# Altium PCB {TEX137}_F2837x_controlCARD_R1.3_PCB_PADS.PcbDoc (part 5 of 6)
Units mil, origin at the board's own origin, x right, y up, seen from the top; angles counter-clockwise.
Board outline 4163.98 x 2011.3 mil, 10 copper layers (Primary Side, Inner Layer 2, Inner Layer 3, Inner Layer 4, Inner Layer 5, Inner Layer 6, Inner Layer 7, Inner Layer 8, Inner Layer 9, Secondary Side), stack 103.5 mil thick; 292 components, 317 nets, 1400 pads, 1032 vias.
Unrouted connection lines stored in the file: 106.
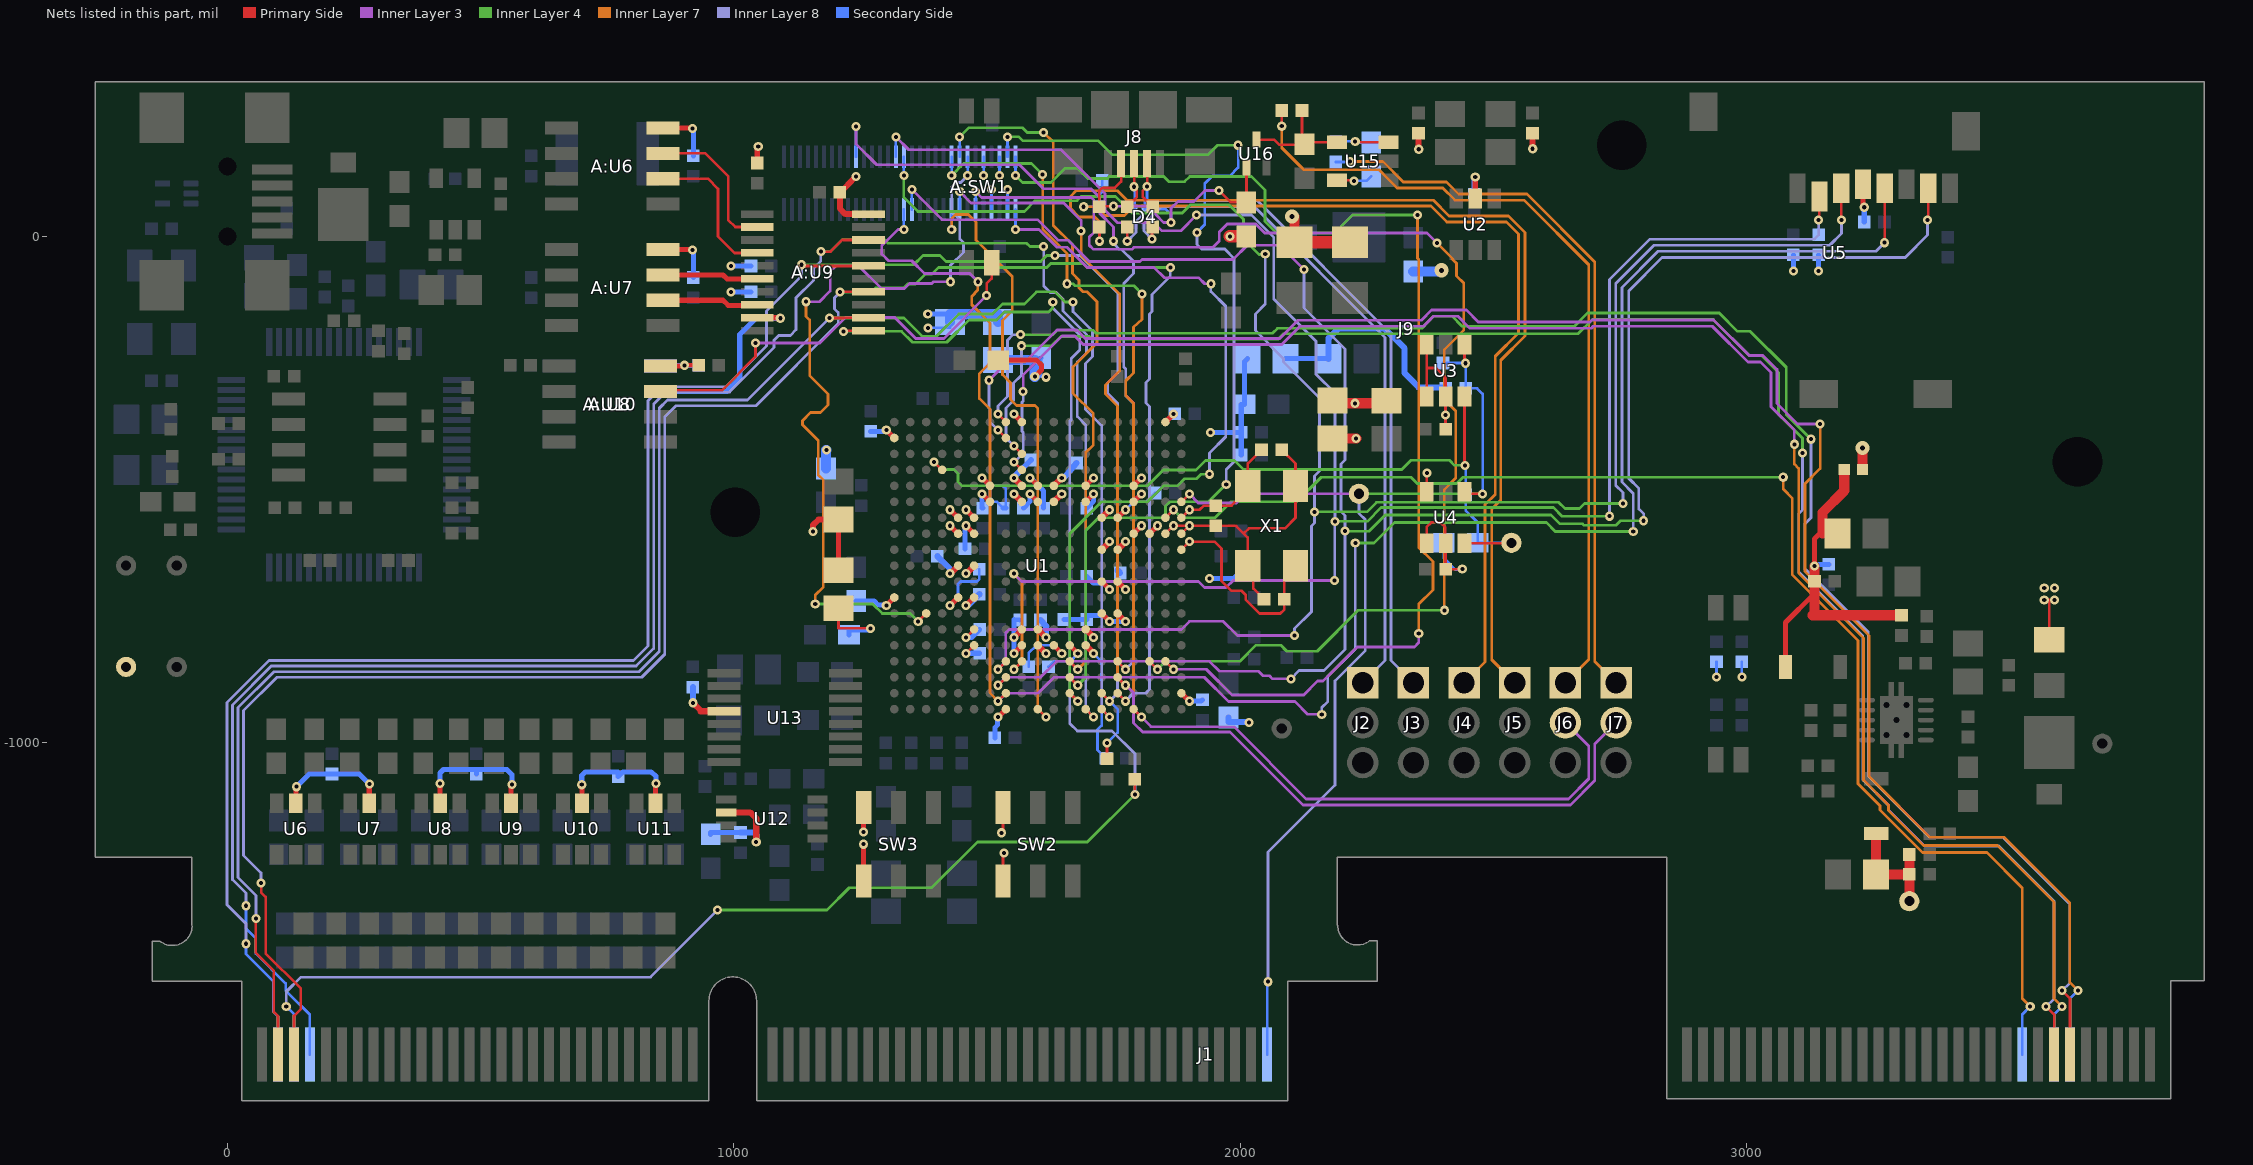
[diagram p13: the nets of this part, all layers, seen from the top]

## Via types
v1: diameter 18, hole 8, Primary Side to Secondary Side, 1025 vias
v2: diameter 28, hole 10, Primary Side to Secondary Side, 7 vias

## Nets (pads, with @x,y where several pads share a name; then routed paths per layer and width w, separated by ;. In a path a pad name is that pad's centre, name@x,y a point inside that pad or via, vN(x,y) a via of type N, cw(c..) or ccw(c..) an arc to the next point about the centre after c; other vN are vias at no path point) (continued)
MCU_GPIO-114: J9.48 U1.N3 | length 1556.8
  Primary Side w5.3: v1(1363.78,-760.24) U1.N3@1379.53,-744.49
  Inner Layer 3 w5.5: v1(1142.54,-128.99) 1168.99,-128.99 1189.99,-107.99 1189.99,-69.02 1200.99,-58.02 1245.99,-58.02 1290.99,-103.02 1336.99,-103.02 1346.99,-93.02 1390.5,-93.02 1393.98,-89.54 v1(1427.49,-89.54)
  Inner Layer 4 w5.5: v1(1160.51,-726.02) 1161,-725.54 1274,-725.54 1293,-744.54 1348.07,-744.54 v1(1363.78,-760.24)
  Inner Layer 7 w5.5: v1(1142.54,-128.99) 1142.54,-157.99 1149.54,-164.99 1149.54,-274.99 1185.54,-310.99 1185.54,-332.99 1170.54,-347.99 1151.54,-347.99 1135.54,-363.99 1135.54,-371.99 1166.54,-402.99 1166.54,-470.99 1176.54,-480.99 1176.54,-691.97 1160.51,-707.99 v1(1160.51,-726.02)
  Inner Layer 8 w5.5: v1(1427.49,-89.54) 1427.49,-57.03 1453.01,-31.51 1453.01,-12.54 1446.01,-5.54 1446.01,32.46 1430.01,48.46 1430.01,97.46 1439.01,106.46 1447.77,106.46 v1(1461.46,120.16)
  Secondary Side w5.3: v1@1461.42,120.16 J9.48@1461.42,157.16
MCU_GPIO-115: J9.59 U1.V12 | length 1555.1
  Primary Side w5.3: U1.V12@1662.99,-901.97 v1(1678.74,-917.72)
  Inner Layer 3 w5.5: v1(1555.96,13.85) 1602.15,13.85 1637.54,-21.54 1657.54,-21.54 1697.54,-61.54 1829.54,-61.54 1849.54,-81.54 1917.54,-81.54 1929.54,-93.54 v1(1941.54,-93.54)
  Inner Layer 4 w5.5: v1(1678.74,-917.72) 1662.99,-901.97 1662.99,-587.01 1725.96,-524.04 1816.57,-524.04 1848.07,-492.54 1875.63,-492.54 1889.63,-478.54 1913.01,-478.54 1922.01,-469.54 v1(1939.01,-469.54)
  Inner Layer 8 w5.5: v1(1939.01,-469.54) 1939.01,-427.54 1971.01,-395.54 1971.01,-138.06 1941.54,-108.59 v1(1941.54,-93.54)
  Secondary Side w5.3: J9.59@1555.91,53.22 1555.91,13.9 v1(1555.96,13.85)
MCU_GPIO-116: J9.43 U1.W10 | length 1212.7
  Primary Side w4.5: U1.W10@1600,-933.46 v1(1615.75,-949.21)
  Inner Layer 7 w5.5: v1(1429.96,13.85) 1429.96,35.51 1437.68,43.22 1462.68,43.22 1477.68,28.22 1477.68,-7.46 1549.54,-79.31 1549.54,-146.48 1529.99,-166.02 1529.99,-273.02 1545.99,-289.02 1545.99,-322.02 1557.99,-334.02 1594.56,-334.02 1600,-339.46 1600,-933.46 v1(1615.75,-949.21)
  Secondary Side w5.3: J9.43@1429.92,53.22 1429.92,13.89 v1(1429.96,13.85)
MCU_GPIO-117: J9.58 U1.U12 | length 1962.9
  Primary Side w5.3: U1.U12@1662.99,-870.47 v1(1678.74,-886.22)
  Inner Layer 4 w5.5: v1(1540.18,196.53) 1562.51,196.53 1570.08,188.97 1719.03,188.97 1747.02,160.98 1935.51,160.98 1954.51,179.98 v1(1995.51,179.98) ; v1(1678.74,-886.22) 1694.53,-870.44 1694.53,-580.47 1719.46,-555.54 1844.13,-555.54 1852.01,-547.66 1852.01,-532.54 1860.46,-524.08 1936.46,-524.08 1971.01,-489.54 v1(1972.01,-489.54)
  Inner Layer 8 w5.5: v1(1913.98,7.46) 1913.98,-16.03 1922.98,-25.03 1968.98,-25.03 1987.48,-43.54 1987.48,-445.03 1972.01,-460.5 v1(1972.01,-489.54)
  Secondary Side w5.3: J9.58@1540.16,157.16 v1(1540.18,196.53) ; v1(1913.98,7.46) 1929.54,23.02 1929.54,104.02 1944.98,119.46 1978.98,119.46 1995.51,136 v1(1995.51,179.98)
MCU_GPIO-118: J9.46 U1.T12 | length 1396.1
  Primary Side w5.3: U1.T12@1662.99,-838.98 v1(1678.74,-854.73)
  Inner Layer 4 w5.5: v1(1445.68,196.53) 1463.81,214.66 1569.31,214.66 1578.99,204.98 v1(1611.51,204.98)
  Inner Layer 7 w5.5: v1(1611.51,204.98) 1630.51,185.98 1630.51,21.49 1668.34,-16.34 1668.34,-73.54 1681.54,-86.73 1681.54,-101.54 1689.54,-109.54 1697.54,-109.54 1717.03,-129.03 1717.03,-210.04 1669.54,-257.54 1669.54,-310.06 1709.5,-350.03 1709.5,-412.05 1694.5,-427.05 1694.5,-838.97 v1(1678.74,-854.73)
  Secondary Side w5.3: J9.46@1445.67,157.16 v1(1445.68,196.53)
MCU_GPIO-119: J9.20 U1.T15 | length 1626.2
  Primary Side w5.3: U1.T15@1757.48,-838.98 v1(1773.23,-854.73)
  Inner Layer 3 w5.5: v1(1240.95,217.16) 1240.95,182.41 1281.95,141.41 1563.59,141.41 1611.02,93.98 1705.04,93.98 1722.27,76.74 1722.27,45.73 1749.54,18.46 v1(1749.54,-9.54)
  Inner Layer 8 w5.5: v1(1749.54,-9.54) 1749.54,-13.54 1761.54,-25.54 1765.54,-25.54 1789,-49 1789,-73.54 1769.54,-93 1769.54,-257.54 1773.54,-261.54 1773.54,-314.07 1789,-329.54 1789,-838.96 v1(1773.23,-854.73)
  Secondary Side w5.3: J9.20@1240.95,157.16 v1(1240.95,217.16)
MCU_GPIO-120: J7.2 J9.45 U1.U15 | length 2509.8
  Primary Side w5.6: U1.U15@1757.48,-870.47 v1(1773.23,-886.22)
  Inner Layer 3 w5.5: v1(1445.71,88.66) 1468.41,65.96 1651.04,65.96 1685.54,31.46 v1(1685.54,10.46) ; 1789,-960.42 1789,-900.94
  Inner Layer 3 w5.6: v1(1773.23,-886.22) 1774.28,-886.22 1789,-900.94 ; 1789,-960.42 1807.1,-978.52 1979.51,-978.52 2123.51,-1122.52 2651.51,-1122.52 2699.51,-1074.52 2699.51,-1002.3 J7.2@2741.54,-960.28
  Inner Layer 7 w5.5: v1(1685.54,10.46) 1685.54,-37.54 1761.54,-113.54 1761.54,-265.54 1733.54,-293.54 1733.54,-311.09 1757.48,-335.03 1757.48,-872.99 v1(1773.23,-886.22)
  Secondary Side w5.3: J9.45@1445.67,53.22 v1(1445.71,88.66)
MCU_GPIO-121: J6.2 J9.44 U1.W16 | length 2607.3
  Primary Side w5.6: U1.W16@1788.98,-933.46 v1(1804.73,-949.21)
  Inner Layer 3 w5.6: v1(1804.73,-949.21) 1823.49,-967.98 1986.97,-967.98 2129.51,-1110.52 2647.7,-1110.52 2687.51,-1070.71 2687.51,-1006.25 J6.2@2641.54,-960.28
  Inner Layer 4 w5.5: v1(1429.96,120.16) 1453.59,143.78 1587.67,143.78 v1(1609.49,121.97) ; v1(1657.54,-93.54) 1669.54,-93.54 1673.54,-97.54 1789.54,-97.54 v1(1805.54,-113.54)
  Inner Layer 7 w5.5: v1(1609.49,121.97) 1609.49,14.51 1657.54,-33.54 v1(1657.54,-93.54) ; v1(1804.73,-949.21) 1789,-933.49 1789,-329.54 1773.54,-314.07 1773.54,-285 1789,-269.54 1789,-179 1805.54,-164.02 v1(1805.54,-113.54)
  Secondary Side w5.3: v1@1429.92,120.16 J9.44@1429.92,157.16
MCU_GPIO-122: J9.32 U1.T8 U5.3 | length 4082.5
  Primary Side w5.3: v1(1521.26,-854.73) U1.T8@1537.01,-838.98 ; U5.3@3186,95 3186,32.52 v1(3186.54,32.52)
  Inner Layer 3 w5.5: v1(1521.26,-854.73) 1536.54,-839.45 1536.54,-782.48 1543.04,-775.98 1883.56,-775.98 1899.54,-760 1966.02,-760 1994.04,-788.02 v1(2107,-788.02)
  Inner Layer 4 w5.5: v1(1335.46,120.16) 1335.46,76.85 1363.03,49.28 1573.54,49.28 1594.72,70.46 1677.54,70.46 1685.54,78.46 1753.54,78.46 1786.02,45.98 1885.05,45.98 1901.54,62.46 1977.54,62.46 2006.28,33.72 2006.28,-4.79 2036.99,-35.5 2048.51,-35.5 v1(2048.99,-35.02) ; v1(2146.03,-543.8) 2249.6,-543.8 2268.3,-525.1 2628.51,-525.1 2640.89,-537.48 2669.54,-537.48 2679.54,-527.48 v1(2755.54,-527.48)
  Inner Layer 8 w5.5: v1(2048.99,-35.02) 2048.99,-133.54 2029.54,-152.99 2029.54,-186.04 2085.03,-241.54 2085.03,-248.02 2156.03,-319.02 2156.03,-462.98 2146.03,-472.98 v1(2146.03,-543.8) 2146.03,-566.02 2140.01,-572.05 2140.01,-740.99 2106.5,-774.5 2106.5,-794 v1(2107,-788.02) ; v1(2755.54,-527.48) 2755.54,-505.98 2741.04,-491.48 2741.04,-92.98 2816.54,-17.48 3163.54,-17.48 3186.54,5.52 v1(3186.54,32.52)
  Secondary Side w5.3: v1(1335.46,120.16) J9.32@1335.46,157.16
MCU_GPIO-123: J9.33 U1.U8 U5.7 | length 4272.7
  Primary Side w5.3: v1(1521.26,-886.22) U1.U8@1537.01,-870.47 ; v1(3356.54,32.52) 3358,32.52 U5.7@3358,95
  Inner Layer 3 w5.5: v1(1351.21,92.6) 1410.85,32.96 1599.04,32.96 1639.54,-7.54 1659.54,-7.54 1701.54,-49.54 1801.54,-49.54 1805.54,-45.54 1985.54,-45.54 2013.54,-17.54 2077.54,-17.54 v1(2125.54,-65.54) ; v1(1521.26,-886.22) 1537,-870.48 1605.52,-870.48 1637.02,-838.98 1939.04,-838.98 1958.57,-858.51 2035.46,-858.51 2044.46,-867.51 2057.46,-867.51 2063.46,-873.51 v1(2099.46,-873.51)
  Inner Layer 4 w5.5: v1(2206.61,-582) 2206.31,-582.3 2206.31,-582.18 2253.81,-582.18 2285.97,-550.02 2613.06,-550.02 2630.51,-567.48 2675.11,-567.48 2678.04,-570.41 2741.61,-570.41 2750.54,-561.48 v1(2796.04,-561.48)
  Inner Layer 8 w5.5: v1(2099.46,-873.51) 2115.95,-857.02 2164.95,-857.02 2206.61,-815.37 v1(2206.61,-582) 2206.61,-551.35 2198.74,-543.48 2198.74,-449.19 2206.61,-441.31 2206.61,-222.14 2125.54,-141.06 v1(2125.54,-65.54) ; v1(2796.04,-561.48) 2796.04,-547.48 2786.54,-537.98 2786.54,-497.48 2766.54,-477.48 2766.54,-107.48 2832.54,-41.48 3312.54,-41.48 3356.54,2.52 v1(3356.54,32.52)
  Secondary Side w5.3: J9.33@1351.18,53.22 v1(1351.21,92.6)
MCU_GPIO-124: J9.31 U1.V8 U5.5 | length 4001
  Primary Side w5.3: v1(1521.26,-917.72) U1.V8@1537.01,-901.97 ; v1(3271.54,-12.48) 3272,-12.02 U5.5@3272,95
  Inner Layer 3 w5.5: v1(1335.46,13.85) 1323.86,13.85 1291.99,-18.02 1291.99,-35.02 1304.99,-48.02 1350.99,-48.02 1376.5,-73.54 1465.54,-73.54 v1(1481.54,-89.54) ; v1(1521.26,-917.72) 1536.96,-902.02 1600.5,-902.02 1632.04,-870.48 1928.46,-870.48 1976.48,-918.5 2107.51,-918.5 2132.51,-943.5 2159.99,-943.5 v1(2160.51,-944.02)
  Inner Layer 4 w5.5: v1(2226.71,-605.3) 2226.71,-605.5 2263.69,-605.5 2304.17,-565.02 2604.06,-565.02 2621.51,-582.48 v1(2775.54,-582.48)
  Inner Layer 7 w5.5: v1(1481.54,-89.54) 1481.54,-105.52 1469.48,-119.03 1469.48,-135.04 1505.51,-171.22 1505.51,-250.01 1484.49,-271.03 1484.49,-320.01 1505.51,-341.03 1505.51,-901.46 v1(1521.26,-917.72)
  Inner Layer 8 w5.5: v1(2160.51,-944.02) 2160.51,-930.49 2172.5,-918.5 2172.5,-868.48 2226.71,-814.27 v1(2226.71,-605.3) ; v1(2775.54,-582.48) 2775.54,-507.48 2753.04,-484.98 2753.04,-100.98 2824.54,-29.48 3254.54,-29.48 v1(3271.54,-12.48)
  Secondary Side w5.3: v1@1335.43,13.88 J9.31@1335.43,53.22
MCU_GPIO-125: J9.30 R15.2 U1.T9 U5.2 | length 4098
  Primary Side w5.3: v1(1552.75,-854.73) U1.T9@1568.5,-838.98 ; v1(3141.54,32.52) 3143,37.52 U5.2@3143,79
  Inner Layer 3 w5.5: v1(1319.68,196.53) 1345.24,170.98 1645.99,170.98 1732.54,84.43 1732.54,51.46 1757.02,26.98 1829.02,26.98 1845.02,10.98 1882.05,10.98 v1(1913.54,42.46) ; v1(1552.54,-665.99) 1567.88,-681.34 1917.15,-681.34 1929.1,-693.29 1971.71,-693.29 1985.84,-679.15 v1(2185.97,-679.15)
  Inner Layer 4 w5.5: v1(2186.54,-562.6) 2250.49,-562.6 2277.78,-535.3 2617.79,-535.3 2634.97,-552.48 v1(2728.54,-552.48)
  Inner Layer 7 w5.5: v1(1552.54,-665.99) 1568.5,-681.96 1568.5,-838.98 v1(1552.75,-854.73)
  Inner Layer 8 w5.5: v1(1913.54,42.46) 2021.54,42.46 2065.54,-1.54 2065.54,-123.26 2149.31,-207.03 2149.31,-272.18 2186.54,-309.41 v1(2186.54,-562.6) 2185.97,-563.17 v1(2185.97,-679.15) ; v1(2728.54,-552.48) 2728.54,-85.48 2808.54,-5.48 3133.54,-5.48 3141.54,2.52 v1(3141.54,32.52)
  Secondary Side w5.3: J9.30@1319.69,157.16 v1(1319.68,196.53) ; R15.2@3141.54,3.46 v1(3141.54,32.52)
MCU_GPIO-133: J1.164 U1.G18 | length 2698.7
  Primary Side w5.3: U1.G18@1851.97,-555.51 v1(1867.72,-539.76)
  Inner Layer 4 w5.5: v1(1867.72,-539.76) 1883.47,-555.51 1949.48,-555.51 1981.01,-523.98 2111.04,-523.98 2159.54,-475.48 2336.48,-475.48 2349.03,-488.03 2426.93,-488.03 2439.48,-475.48 v1(3071.54,-475.48)
  Inner Layer 7 w5.5: v1(3071.54,-475.48) 3071.54,-499.1 3089.61,-517.18 3089.61,-668.25 3218.98,-797.62 3218.98,-1080.63 3262.54,-1124.19 3262.54,-1132.48 3346.54,-1216.48 3473.54,-1216.48 3543.44,-1286.39 3543.44,-1504.85 v1(3559.19,-1520.6)
  Secondary Side w5.3: J1.164@3543.51,-1615.1 3543.51,-1536.29 v1(3559.19,-1520.6)
MCU_GPIO-136: J9.49 U1.T17 | length 2535.4
  Primary Side w5.3: U1.T17@1820.47,-838.98 v1(1836.22,-854.73)
  Inner Layer 3 w5.5: v1(1477.21,88.66) 1488.91,76.96 1705.04,76.96 1710.54,71.46 1710.54,7.46 1701.54,-1.54 1701.54,-17.54 1709.54,-25.54 1785.54,-25.54 1789.54,-21.54 1945.95,-21.54 1957.95,-9.54 1957.95,8.16 1973.95,24.16 2030.25,24.16 2047.95,6.46 2368.54,6.46 v1(2388,-13)
  Inner Layer 4 w5.5: v1(1836.22,-854.73) 1851.97,-838.98 1998.51,-838.98 2030.46,-807.02 2079.51,-807.02 2091.51,-819.02 2151.51,-819.02 2232.32,-738.22 v1(2402.53,-738.22)
  Inner Layer 7 w5.5: v1(2388,-13) 2419.5,-44.5 2418,-44.5 2426.5,-53 2426.5,-78 2441,-92.5 2441,-184.53 2402.53,-223 2402.53,-321.84 2424.95,-344.26 2424.95,-477.42 2402.53,-499.84 v1(2402.53,-738.22)
  Secondary Side w5.3: J9.49@1477.17,53.22 v1(1477.21,88.66)
MCU_GPIO-137: J9.60 U1.T18 | length 2403.1
  Primary Side w5.3: U1.T18@1851.97,-838.98 v1(1867.72,-854.73)
  Inner Layer 3 w5.5: v1(1867.72,-854.73) 1932.46,-854.73 1983.25,-905.51 2124.98,-905.51 2152.46,-878.02 2162.97,-878.02 2230.51,-810.48 2343.51,-810.48 2352.03,-801.96 v1(2352.03,-783.85)
  Inner Layer 4 w5.5: v1(1555.96,120.16) 1569.6,106.53 1625.6,106.53 1653.54,134.46 1677.98,134.46 1697.98,114.46 1737.54,114.46 1741.04,117.97 1848.49,117.97 1858.49,107.97 1889.54,107.97 1900.03,118.46 2021.54,118.46 2048.29,91.71 2048.29,29.22 2071.04,6.46 2185.54,6.46 2221.54,42.46 v1(2349.54,42.46)
  Inner Layer 7 w5.5: v1(2349.54,42.46) 2349.54,-43.04 2352.03,-45.54 2352.03,-614.02 2380,-642 2380,-698.05 2352.03,-726.02 v1(2352.03,-783.85)
  Secondary Side w5.3: J9.60@1555.91,157.16 1555.91,120.16 v1(1555.96,120.16)
MCU_GPIO-161: J1.167 U1.C9 | length 3480.4
  Primary Side w5.3: v1(1552.75,-413.78) U1.C9@1568.5,-429.53 ; v1(3590.69,-1520.6) 3606.42,-1536.33 J1.167@3606.42,-1615.1
  Inner Layer 4 w5.5: v1(1567.99,-216.02) 1627.05,-216.02 1645.54,-197.54 1701.54,-197.54 1707.1,-203.1 2074.44,-203.1 2085.44,-192.1 2666.91,-192.1 2694.81,-164.2 2933.26,-164.2 3004.84,-235.78 3029.84,-235.78 3062.54,-268.48 3062.54,-351.48 3109.54,-398.48 v1(3109.54,-427.48)
  Inner Layer 8 w5.5: v1(1552.75,-413.78) 1537.01,-398.03 1537.01,-338.97 1543.71,-332.25 1551.99,-323.97 1551.99,-289.77 1567.68,-274.08 1567.68,-242.58 1567.99,-227.58 v1(1567.99,-216.02) ; v1(3109.54,-427.48) 3109.54,-540.48 3102.06,-547.95 3102.06,-662.1 3228.47,-788.51 3228.47,-1072.13 3279.54,-1123.19 3279.54,-1132.48 3350.54,-1203.48 3497.44,-1203.48 3606.44,-1312.48 3606.44,-1505.35 v1(3590.69,-1520.6)
MCU_GPIO-162: J1.168 U1.D9 | length 3468.5
  Primary Side w5.3: v1(1552.75,-445.27) U1.D9@1568.5,-461.02
  Inner Layer 3 w5.5: v1(1570.99,-306.02) 1570.99,-273.51 1647.73,-196.78 1672.78,-196.78 1689.54,-213.54 2081.54,-213.54 2117.54,-177.54 2361.54,-177.54 2381.54,-157.54 2429.04,-157.54 2453.04,-181.54 2692.48,-181.54 2696.54,-177.48 2931.54,-177.48 3001.94,-247.88 3026.94,-247.88 3047.54,-268.48 3047.54,-336.48 3093.54,-382.48 v1(3093.54,-410.48)
  Inner Layer 7 w5.5: v1(3093.54,-410.48) 3093.54,-449.58 3102.11,-458.15 3102.11,-664.85 3229.98,-792.72 3229.98,-1073.63 3279.54,-1123.19 3279.54,-1133.48 3348.54,-1202.48 3494.51,-1202.48 3606.44,-1314.41 3606.44,-1504.85 v1(3622.19,-1520.6)
  Inner Layer 8 w5.5: v1(1552.75,-445.27) 1570.99,-429.52 1570.99,-387.02 1568.99,-385.02 1568.99,-327.02 1570.99,-325.02 v1(1570.99,-306.02)
  Secondary Side w5.3: J1.168@3606.51,-1615.1 3606.51,-1536.29 v1(3622.19,-1520.6)
MCU_GPIO-163: J1.169 U1.A8 | length 3497.8
  Primary Side w5.3: v1(1521.29,-350.78) U1.A8@1537.01,-366.54 ; v1(3622.19,-1489.1) 3637.92,-1504.82 J1.169@3637.92,-1615.1
  Inner Layer 4 w5.5: v1(1565.99,-194.02) 1629.54,-194.02 1638.03,-185.54 1709.54,-185.54 1715.3,-191.3 2063.14,-191.3 2072.9,-181.54 2357.86,-181.54 2381.38,-157.54 2417.59,-157.54 2437.54,-177.48 2659.33,-177.48 2685.51,-151.3 2945.36,-151.3 2981.54,-187.48 3006.54,-187.48 3077.54,-258.48 3077.54,-351.48 v1(3126.54,-400.48)
  Inner Layer 8 w5.5: v1(1521.29,-350.78) 1521.29,-335.04 1539.99,-316.33 1539.99,-205.02 1550.99,-194.02 v1(1565.99,-194.02) ; v1(3126.54,-400.48) 3126.54,-555.48 3114.06,-567.95 3114.06,-656.1 3239.47,-781.51 3239.47,-1065.13 3360.82,-1186.48 3505.44,-1186.48 3637.44,-1318.48 3637.44,-1473.86 v1(3622.19,-1489.1)
MCU_GPIO-164: J1.170 U1.B8 | length 3548.9
  Primary Side w5.3: v1(1521.29,-382.28) U1.B8@1537.01,-398.03
  Inner Layer 3 w5.5: v1(1503.49,-284.03) 1539.24,-248.28 1574.45,-248.28 1637.7,-185.02 1677.02,-185.02 1693.54,-201.54 2077.54,-201.54 2113.54,-165.54 2357.54,-165.54 2377.54,-145.54 2446.04,-145.54 2469.54,-169.03 2689.98,-169.03 2693.84,-165.18 2934.24,-165.18 3004.44,-235.38 3031.94,-235.38 3059.04,-262.48 3059.04,-329.98 3099.54,-370.48 v1(3144.54,-370.48)
  Inner Layer 7 w5.5: v1(3144.54,-370.48) 3144.54,-458.48 3114.54,-488.48 3114.54,-661.38 3240.98,-787.82 3240.98,-1065.92 3361.54,-1186.48 3508.01,-1186.48 3637.38,-1315.85 3637.38,-1473.35 3637.94,-1473.35 v1(3653.69,-1489.1)
  Inner Layer 8 w5.5: v1@1503.46,-284.06 1503.46,-339.98 1505.51,-342.03 1505.51,-366.5 v1(1521.29,-382.28)
  Secondary Side w5.3: J1.170@3638.01,-1615.1 3638.01,-1504.79 v1(3653.69,-1489.1)
MCU_GPIO-168: C5.2 R19.2 TP3.1 U1.D4 U3.6 U4.6 | length 1599.3
  Primary Side w5.3: v1(1395.27,-445.27) U1.D4@1411.02,-461.02 ; U4.6@2442.4,-606 2534,-606 TP3.1@2535,-605 ; U3.6@2442.4,-316 2442.4,-450.91 v1(2443.51,-452.02)
  Inner Layer 4 w5.5: v1(1395.27,-445.27) 1410.47,-460.47 1434.59,-460.47 1442.46,-468.35 1442.46,-484.66 1450.34,-492.54 1816.01,-492.54 1847.56,-460.98 1912.5,-460.98 1930.94,-442.54 1988.07,-442.54 2006.01,-460.47 2318.51,-460.47 2336.96,-442.02 2412.51,-442.02 2422.51,-452.02 v1(2443.51,-452.02)
  Secondary Side w5.3: v1(2443.51,-452.02) 2445,-453.51 C5.2@2445,-510 2444.51,-510.49 2444.51,-541.04 2468.5,-565.02 R19.2@2468.5,-605 TP3.1@2535,-605
MCU_TCK: A:U9.14 J1.5 U1.V15 | length 4236.4
  Primary Side w5.3: v1(66.54,-1276.54) 66.54,-1295.1 75.53,-1304.09 75.53,-1415.76 144.87,-1485.1 144.87,-1525.22 131.3,-1538.79 J1.5@131.3,-1615.1 ; v1(1209.56,-110.1) 1210.18,-109.49 A:U9.14@1266.06,-109.49 ; U1.V15@1757.48,-901.97 v1(1773.23,-917.72)
  Inner Layer 4 w5.5: v1(1209.56,-110.1) 1246.03,-110.1 1251.32,-104.81 1277.16,-104.81 1279.93,-102.03 1334.75,-102.03 1342.75,-94.03 1358.51,-94.03 1378.02,-74.52 1390.8,-74.52 1403.78,-61.54 1617.54,-61.54 1625.54,-53.54 1689.54,-53.54 1697.54,-61.54 v1(1861.54,-61.54)
  Inner Layer 8 w5.5: v1(66.54,-1276.54) 66.54,-1256.54 32.03,-1222.03 32.03,-935.97 97.53,-870.47 818.03,-870.47 863.5,-825 863.5,-356.29 885.5,-334.29 1043.79,-334.29 1205.76,-172.31 1205.76,-150.31 1198.48,-143.03 1198.48,-121.18 v1(1209.56,-110.1) ; v1(1773.23,-917.72) 1788.44,-901.97 1812.95,-901.97 1820.47,-894.44 1820.51,-336.03 1813.49,-329.01 1813.49,-288.53 1820.51,-281.5 1820.52,-153.26 1825.54,-148.24 1825.54,-114.55 1861.54,-78.55 v1(1861.54,-61.54)
MCU_TDI: A:U9.18 J1.8 U1.W13 | length 4212.1
  Primary Side w5.3: v1(1171.56,-30.1) 1190.56,-30.13 1213.56,-7.13 A:U9.18@1266.06,-7.13 ; U1.W13@1694.49,-933.46 v1(1710.24,-949.21)
  Inner Layer 4 w5.5: v1(1171.56,-30.1) 1190.9,-30.1 1214.52,-6.48 1296.84,-6.48 1303.89,-13.54 1577.94,-13.54 1584.42,-20.02 1610.54,-20.02 v1(1611.54,-20.02)
  Inner Layer 8 w5.5: v1(36.54,-1321.54) 36.54,-1296.54 10.03,-1270.03 10.03,-924.97 86.53,-848.47 807.03,-848.47 841.5,-814 841.5,-331.33 864.83,-308 991,-307.55 1078.98,-219.57 1078.98,-205.02 1088.5,-195.5 1111.48,-195.5 1122.76,-184.22 1122.76,-121.24 1157.02,-86.99 1157.02,-63.54 1171.56,-48.99 v1(1171.56,-30.1) ; v1(1611.54,-20.02) 1611.54,-97.54 1624.54,-110.54 1636.54,-110.54 1649.54,-123.54 1649.54,-147.08 1695.99,-193.54 1695.99,-230.3 1677.99,-248.3 1677.99,-355.55 1694.49,-372.05 1694.49,-933.46 v1(1710.24,-949.21)
  Secondary Side w5.3: v1(36.54,-1321.54) 36.54,-1366.54 56.18,-1386.18 56.18,-1416.18 115,-1475 115,-1488.92 162.8,-1536.72 J1.8@162.8,-1615.1
MCU_TDO: A:U9.11 J1.6 R10.1 | length 3604.4
  Primary Side w5.3: v1(1216.54,-187.48) 1217.76,-186.26 A:U9.11@1266.06,-186.26 ; v1(1791.54,-1101.54) R10.1@1791.54,-1071.54
  Inner Layer 4 w5.5: v1(967.38,-1330.1) 1183.4,-1330.1 1227.61,-1285.89 1390.39,-1285.89 1480.81,-1195.47 1697.6,-1195.47 v1(1791.54,-1101.54) ; v1(1216.54,-187.48) 1330.94,-187.48 1352.49,-209.03 1420.16,-209.03 1464.17,-165.02 1518.5,-165.02 1533.98,-149.54 1621.54,-149.54 1629.54,-141.54 1629.54,-130.86 v1(1629.54,-129.54)
  Inner Layer 8 w5.5: v1(116.18,-1520.1) 116.18,-1491.3 145,-1462.48 835,-1462.48 v1(967.38,-1330.1) ; v1(1629.54,-129.54) 1629.54,-141.57 1682.68,-194.72 1682.68,-224.17 1666,-240.85 1666,-362.03 1662.99,-365.03 1662.99,-961.54 1677.99,-976.54 1746.59,-976.54 1791.54,-1021.48 v1(1791.54,-1101.54)
  Secondary Side w5.3: v1(116.18,-1520.1) 131.3,-1535.1 J1.6@131.3,-1615.1
MCU_TMS: A:U9.12 J1.3 U1.W14 | length 3986
  Primary Side w5.3: v1(56.18,-1346.54) 56.18,-1414.48 91.67,-1449.97 91.67,-1531.48 99.81,-1539.62 J1.3@99.81,-1615.1 ; v1(1188.56,-161.1) 1216.1,-161.1 1216.54,-160.67 A:U9.12@1266.06,-160.67 ; U1.W14@1725.98,-933.46 v1(1741.73,-949.21)
  Inner Layer 4 w5.5: v1(1188.56,-161.1) 1335.49,-161.1 1371.42,-197.03 1400.48,-197.03 1443.98,-153.54 1509.98,-153.54 1529.98,-133.54 1573.54,-133.54 1597.57,-109.5 1633.5,-109.5 1653.54,-129.54 v1(1669.54,-129.54)
  Inner Layer 8 w5.5: v1(56.18,-1346.54) 56.18,-1301.18 21.03,-1266.03 21.03,-930.47 92.03,-859.47 812.53,-859.47 852.5,-819.5 852.5,-339.33 869,-322.83 1026.83,-322.83 v1(1188.56,-161.1) ; v1(1669.54,-129.54) 1669.54,-148.64 1707.68,-186.78 1707.68,-237.13 1693.99,-250.82 1693.99,-341.55 1725.98,-373.54 1725.98,-933.46 v1(1741.73,-949.21)
MCU_TRSTN: A:U9.16 J1.4 R9.2 U1.V14 | length 4352.8
  Primary Side w5.3: v1(1133.5,-56.03) 1134.29,-58.31 A:U9.16@1266.06,-58.31 ; U1.V14@1725.98,-901.97 v1(1741.73,-917.72) ; R9.2@1736.54,-1031.54 v1(1736.54,-1000.48)
  Inner Layer 4 w5.5: v1(1133.5,-56.03) 1355.04,-56.03 1373.54,-37.54 1407.04,-37.54 1419.04,-49.54 1605.54,-49.54 1617.54,-37.54 v1(1633.54,-37.54)
  Inner Layer 8 w5.5: v1(36.54,-1396.54) 36.54,-1356.98 -0.97,-1319.47 -0.97,-920.54 82.09,-837.47 801.53,-837.47 830.5,-808.5 830.5,-324.5 858,-297 983.55,-297 1064.48,-216.07 1064.48,-147.18 1133.5,-78.16 v1(1133.5,-56.03) ; v1(1633.54,-37.54) 1683.01,-37.54 1758.01,-112.54 1758.01,-269.06 1737.54,-289.54 1737.54,-309.54 1757.48,-329.48 1757.48,-901.97 v1(1741.73,-917.72)
  Secondary Side w5.3: v1(36.54,-1396.54) 36.54,-1416.54 90.64,-1470.64 90.64,-1530.94 99.81,-1540.1 J1.4@99.81,-1615.1 ; v1(1736.54,-1000.48) 1757.54,-979.48 1757.54,-933.52 v1(1741.73,-917.72)
MCU_X1: C7.2 R24.1 U1.G19 X1.1 | length 243.4
  Primary Side w5.3: U1.G19@1883.46,-555.51 v1(1899.21,-539.76) 1919.54,-539.76 1927.76,-531.54 R24.1@1951.54,-531.54 1982.54,-531.54 2013.54,-500.54 2013.54,-493.55 X1.1@2014.29,-492.8 2014.54,-492.55 2014.54,-448.54 C7.2@2041.54,-421.54
MCU_X2: C8.2 U1.J19 X1.3 | length 409.9
  Primary Side w5.3: U1.J19@1883.46,-618.5 v1(1899.26,-602.77) 1948.75,-602.77 1962.54,-616.54 1962.54,-680.54 1981.54,-699.54 2001.54,-699.54 2010.54,-708.54 2010.54,-717.56 2037.51,-744.54 2078.54,-744.54 2086.54,-736.54 C8.2@2086.54,-716.54 2086.54,-672.52 X1.3@2108.78,-650.28
MCU_XRSN: C3.2 J1.120 R18.2 TP2.1 U1.F19 U3.1 U4.1 | length 2216.5
  Primary Side w5.3: U1.F19@1883.46,-524.02 v1(1899.21,-508.27) ; U4.1@2442.4,-504 2442.4,-508.25 v1(2478.09,-508.25) ; U3.1@2442.4,-214 2442.4,-248.34 v1(2444.53,-250.47)
  Inner Layer 3 w5.5: v1(1899.21,-508.27) 1899.84,-508.89 1916.81,-526.51 1992.03,-526.51 2010.28,-508.26 TP2.1@2233.96,-508.25
  Inner Layer 4 w5.5: TP2.1@2233.96,-508.25 v1(2478.09,-508.25)
  Inner Layer 8 w5.5: v1(2054.54,-1471.48) 2054.54,-1215.48 2186.54,-1083.48 2186.54,-877.44 2246.54,-817.44 2246.54,-559.44 2233.96,-546.86 TP2.1@2233.96,-508.25
  Secondary Side w5.3: J1.120@2052.67,-1615.1 2052.67,-1471.48 v1(2054.54,-1471.48) ; C3.2@2400,-250 2444.06,-250 v1(2444.53,-250.47) 2445,-250.94 R18.2@2445,-300 2467,-300 2478.09,-311.09 v1(2478.09,-508.25)
MID_SCI-RX: A:SW1.2 A:U10.7 | length 841.8
  Primary Side w5.3: A:U10.7@855,-306.1 855.9,-304.1 976.04,-304.1 1042.54,-237.6 v1(1042.54,-210.48) ; v1(1498.99,-117.02) 1498.99,-92.91 1508.88,-83.02 A:SW1.2@1508.88,-52.36
  Inner Layer 3 w5.5: v1(1042.54,-210.48) 1169.85,-210.48 1220.31,-160.02 1317.54,-160.02 1359.05,-201.54 1414.48,-201.54 v1(1498.99,-117.02)
MID_TCK: A:U7.7 A:U9.6 | length 189.5
  Primary Side w10: A:U7.7@859.81,-76.1 978.56,-76.1 986.36,-83.9 A:U9.6@1046.06,-83.9
MID_TDI: A:U6.7 A:U9.2 | length 297
  Primary Side w5.3: A:U6.7@859.81,163.9 943.56,163.9 988.56,118.9 988.56,32.6 1002.7,18.46 A:U9.2@1046.06,18.46
MID_TDO: A:U8.2 A:U9.9 | length 392.9
  Primary Side w10: A:U9.9@1046.06,-160.67 1090.51,-160.67 v1(1091.5,-161.66)
  Secondary Side w10: A:U8.2@854.81,-306.1 985.43,-306.1 1011.54,-280 1011.54,-193.66 1043.54,-161.66 v1(1091.5,-161.66)
MID_TMS: A:U7.6 A:U9.8 | length 190.8
  Primary Side w10: A:U7.6@859.81,-126.1 978.56,-126.1 988.56,-136.1 1045.04,-136.1 A:U9.8@1046.06,-135.08
MID_TRSTN: A:U6.6 A:U9.4 | length 301.9
  Primary Side w5.3: A:U6.6@859.81,113.9 948.56,113.9 968.56,93.9 968.56,0.1 1001.38,-32.72 A:U9.4@1046.06,-32.72
OSC_GND: C7.1 C8.1 R24.2 U1.H18 U1.H19 X1.2 X1.4 | length 624.5
  Primary Side w5.3: U1.H18@1851.97,-587.01 v1(1867.72,-571.26) v1(1899.21,-571.26) ; U1.H19@1883.46,-587.01 v1(1899.21,-571.26) ; C8.1@2046.54,-716.54 2025.54,-695.54 2025.54,-653.54 2014.54,-653.54 2014.54,-650.52 X1.2@2014.29,-650.28 2014.29,-594.54 1991.29,-571.54 ; C7.1@2081.54,-421.54 2108.78,-448.78 X1.4@2108.78,-492.8 2108.78,-555.54 2087.78,-576.54 2016.54,-576.54 2006.41,-586.66 1991.29,-571.54 ; v1(1899.21,-571.26) 1951.26,-571.26 R24.2@1951.54,-571.54 1991.29,-571.54
USB0_EPEN: J6.1 R81.1 | length 1619.8
  Primary Side w5.6: v1(2081.54,217.52) R81.1@2081.54,248.46
  Inner Layer 7 w5.6: v1(2081.54,217.52) 2081.54,174.92 2124.98,131.48 2273.51,131.48 2309.51,95.48 2399.51,95.48 2423.51,71.48 2560.07,71.48 2687.51,-55.96 2687.51,-835.56 J6.1@2641.54,-881.54
USB0_GPIO-42: J2.1 R76.1 | length 1359.4
  Primary Side w5.6: v1(1825.54,-5.54) 1825.54,18.46 R76.1@1826.54,18.46
  Inner Layer 8 w5.6: v1(1825.54,-5.54) 1809.54,10.46 1809.54,25.46 1842.54,58.46 2027.54,58.46 2285.54,-199.54 2285.54,-837.54 J2.1@2241.54,-881.54
USB0_GPIO-43: J3.1 R77.1 | length 1410.6
  Primary Side w5.6: v1(1776.54,-9.54) R77.1@1776.54,18.46
  Inner Layer 8 w5.6: v1(1776.54,-9.54) 1793.54,7.46 1793.54,29.46 1834.54,70.46 2033.54,70.46 2297.54,-193.54 2297.54,-837.54 J3.1@2341.54,-881.54
USB0_GPIO-46: J4.1 R79.1 R80.1 | length 1913.5
  Inner Layer 7 w5.5: v1(1690.54,58.46) 1715.49,58.46 1732.49,40.97 1770.97,40.97 1790,60 2376,60 2407.42,28.58 2525.35,28.58 2548.97,4.95 2548.97,-190.67 2503.07,-236.57 2503.07,-509.46 2483.07,-529.46 2483.07,-840 J4.1@2441.54,-881.54
  Secondary Side w5.3: v1(1690.54,58.46) 1691.07,59 R80.1@1721.54,58.46 1721.54,82 1727,87.46 R79.1@1727,111
USB0_GPIO-47: J5.1 R82.1 | length 2029.4
  Primary Side w5.6: v1(1721.54,-9.54) R82.1@1721.54,18.46
  Inner Layer 7 w5.6: v1(1721.54,-9.54) 1721.54,29.42 1712.49,38.46 1681.49,38.46 1664.49,55.46 1664.49,78.97 1675.49,89.97 1757.01,89.97 1775.5,71.48 2380.52,71.48 2412.03,39.97 2529.28,39.97 2561.71,7.55 2561.71,-196.77 2514,-244.47 2514,-520.54 2496,-538.54 2496,-836 J5.1@2541.54,-881.54
USB0_PFLT: J7.1 R78.1 | length 1442.2
  Inner Layer 7 w5.6: v1(2216.54,147.52) 2281.47,147.52 2321.51,107.48 2406.57,107.48 2430.57,83.48 2565.57,83.48 2699.51,-50.46 2699.51,-839.51 J7.1@2741.54,-881.54
  Secondary Side w5.6: R78.1@2188.07,146.93 2215.94,146.93 v1(2216.54,147.52)
USB-DM: D4.2 J8.2 R76.2 | length 143.2
  Primary Side w5: J8.2@1815.59,143.7 v1(1815.59,98.59) 1807.54,90.54 1807.54,77.46 R76.2@1826.54,58.46
  Secondary Side w5.3: D4.2@1811,53.76 1811,70 1815.59,74.59 v1(1815.59,98.59)
USB-DP: D4.1 J8.3 R77.2 | length 140.2
  Primary Side w5: R77.2@1776.54,58.46 1795.54,77.46 1795.54,92.46 v1(1790,98) J8.3@1790,143.7
  Secondary Side w5.3: v1(1790,98) 1791.32,96.69 D4.1@1791.32,53.76
USB-EPEN: R81.2 R86.1 U15.4 U16.3 | length 243.1
  Primary Side w5.3: U16.3@2031.54,191.02 2066.54,191.02 2076.54,181.02 2125.59,181.02 R86.1@2126.54,181.96 ; R81.2@2121.54,248.46 2121.54,186.96 R86.1@2126.54,181.96 ; U15.4@2190.54,185.86 2122.64,185.86 2122.09,186.41 R86.1@2126.54,181.96
USB-ID: D4.3 J8.4 R82.2 R85.2 U16.1 | length 596.3
  Primary Side w5: v1(1957.54,90.46) 1981.04,66.96 R85.2@2011.54,66.96
  Primary Side w5.3: v1(1749.54,59.46) 1721.54,59.46 R82.2@1721.54,58.46 1721.54,88.59 1720.54,89.59 1726.54,95.59 1751.54,95.59 1764.41,108.46 J8.4@1764.41,143.7 ; R85.2@2011.54,66.96 2011.85,67.28 U16.1@2011.85,135.91
  Inner Layer 3 w5.5: v1(1749.54,59.46) 1817.16,59.46 1848.2,27.48 v1(1863.03,27.48) 1863.03,55.51 1876.49,68.97 1908.56,68.97 1930.06,90.46 v1(1957.54,90.46)
  Secondary Side w5.3: D4.3@1830.69,53.76 1851.75,53.76 1863.03,42.48 v1(1863.03,27.48)
USB-PFLT: R78.2 R84.2 U15.3 | length 138.8
  Primary Side w5.3: v1(2226.54,187.52) 2226.54,185.86 U15.3@2292.54,185.86
  Secondary Side w5.3: R78.2@2188.07,186.93 2188.66,187.52 v1(2226.54,187.52) 2228.63,185.43 R84.2@2258.07,185.43
USB_5V0: C93.1 C94.1 R62.1 R83.1 R84.1 U15.5 | length 383.8
  Primary Side w5.3: U15.5@2190.54,111.06 2222.52,111.06 v1(2224.18,109.4) ; v1(3586.95,-717.84) 3596.54,-717.84 R62.1@3596.54,-796.54
  Primary Side w20: v2(2102,39) 2106.54,39 C93.1@2106.54,-11.54
  Primary Side w25: C93.1@2106.54,-11.54 C94.1@2216.54,-11.54
  Secondary Side w5.3: v1(2224.18,109.4) 2224.33,109.54 2249.18,109.54 R84.1@2258.07,118.43
  Secondary Side w20: R83.1@2341,-69.5 2397,-69.5 v2(2397,-67)
  other v1: 3606.95,-717.84 3586.95,-693.84 3606.95,-693.84
VDD_1V2: C69.2 C70.2 C74.2 D2.2 L2.2 L4.1 R72.1 TP6.1 U4.3 | length 434.1
  Primary Side w5.3: U4.3@2367.6,-504 2367.6,-467.4 v1(2368,-467)
  Primary Side w12: C74.2@2288,-329.54 C74.2@2288,-324.5
  Primary Side w20: L4.1@2181.54,-323.98 2181.54,-329.54 v1(2226.06,-329.54) C74.2@2288,-329.54 ; D2.2@3228,-460 v2(3228,-418) ; L2.2@3255,-1179.13 3255,-1259.44 C70.2@3255.04,-1259.48 C69.2@3320.54,-1259.48 ; TP6.1@3320.54,-1312.48 C69.2@3320.54,-1259.48 ; R72.1@3320.54,-1220.48 C69.2@3320.54,-1259.48
VDD_3V3: A:C21.2 A:C23.2 A:C24.2 A:C26.2 A:C28.2 A:R17.2 A:U6.8 A:U7.8 A:U8.1 A:U9.20 A:U10.8 C1.2 C2.2 C4.2 C6.2 C48.2 C71.2 C78.2 C79.2 C82.2 C91.2 D2.1 J9.52 J9.53 J9.56 J9.57 L1.2 L3.1 L5.1 L6.1 R1.1 R2.2 R12.1 R13.1 R14.1 R15.1 R16.1 R18.1 R19.1 R20.1 R21.1 R63.1 R66.1 R67.1 R85.1 TP5.1 U1.R11 U1.R12 U2.5 U3.3 U3.4 U3.5 U4.4 U4.5 U5.4 | length 3668.3
  Primary Side w5.3: v1(1979,0) v1(1979,0) ; U4.4@2367.6,-606 2367.6,-574 2377,-564.6 2394,-564.6 2404.4,-575 2404.4,-605.4 U4.5@2405,-606 C4.2@2405,-657 v1(2438,-657) ; U3.4@2367.6,-316 2367.6,-259.84 ; U3.3@2367.6,-214 2367.6,-259.84 ; C2.2@2405,-381 v1(2405,-353) U3.5@2405,-316 2404.95,-315.95 2404.95,-278.84 2385.95,-259.84 2367.6,-259.84
  Primary Side w10: A:U10.8@855,-256.1 900.65,-256.1 v1(902.24,-254.51) 903.09,-253.66 A:C28.2@930.24,-254.51 ; A:U7.8@859.81,-26.1 916.93,-26.1 v1(917.99,-27.17) ; A:U6.8@859.81,213.9 917.09,213.9 v1(917.99,212.99) ; A:R17.2@1046,145 1046,175.45 v1(1048.03,177.48) ; L5.1@1206.54,-659.04 C82.2@1206.54,-559.04 ; U1.R11@1631.5,-807.48 v1(1647.25,-823.23) ; U1.R12@1662.99,-807.48 v1(1678.74,-823.23) ; U2.5@2463.56,74.9 v1(2463.56,116.9) ; L1.2@3075.87,-850 3075.87,-762.48 3130.87,-707.48 3130.87,-683.45 R67.1@3133.29,-681.04 3133.54,-681.04 v1(3133.54,-650.48) 3133.54,-597.06 3144.06,-586.54 3149,-586.54 C48.2@3178.79,-586.54 C48.2@3177.54,-586.54 ; U5.4@3229,103 3229,60.06 v1(3231.54,57.52)
  Primary Side w12: v1(1155.95,-582.84) 1155.95,-570.04 1166.95,-559.04 C82.2@1206.54,-559.04 ; v1(1240.95,118.16) 1209,85.16 A:C24.2@1209,87 1209.06,86.94 1209.06,55 1220,44.06 A:U9.20@1266.06,44.06 ; R13.1@2351.54,203.46 2351.54,172.46 v1(2352,172) ; R14.1@2576.54,203.46 2576.54,173.46 v1(2577,173)
  Primary Side w20: v1(3133.54,-650.48) 3133.54,-744.46 3130,-748 R66.1@3305,-748 ; 3149,-586.54 3149,-545 3192,-502 D2.1@3192,-460
  Primary Side w25: v1(1979,0) R85.1@2011.54,-0.04
  Secondary Side w5.3: v1(1383,-180.7) 1426.54,-180.7 C71.2@1426.54,-169.04 ; v1@1492.91,120.16 J9.52@1492.91,157.16 ; J9.53@1508.66,53.22 1508.66,92.54 v1(1508.71,92.6) ; J9.56@1524.41,157.16 1524.41,120.16 v1(1524.46,120.16) ; J9.57@1540.16,53.22 1540.16,92.54 v1(1540.21,92.6) ; C78.2@1581.95,-849.84 1581.95,-822.84 1597.31,-807.48 1632.58,-807.48 1647.25,-822.14 v1(1647.25,-823.23) ; C79.2@1620.95,-849.84 1632.95,-838.84 1664.13,-838.84 v1(1678.74,-823.23) ; R19.1@2401.5,-605 2401.5,-635 2424,-657.5 2437.5,-657.5 v1(2438,-657) ; v1(2405,-353) R18.1@2405,-300 ; v1(2940,-870) R20.1@2940,-840 ; v1(2990,-870) R21.1@2990,-840
  Secondary Side w10: A:U8.1@854.81,-256.1 856.4,-254.51 v1(902.24,-254.51) A:C26.2@930.24,-254.51 ; v1(917.99,-27.17) 919.81,-28.99 A:C23.2@919.81,-81.1 ; v1(917.99,212.99) 919.81,211.17 A:C21.2@919.81,158.9 ; v1(994.54,-109.54) R2.2@1033.54,-109.54 ; v1(994.54,-58.54) R1.1@1033.54,-58.54 ; v1(1382.7,-153.2) 1382.7,-153.5 1426.54,-153.5 C71.2@1426.54,-169.04 ; v1(1938.68,-675.1) 1986.54,-675.1 2001.54,-660.1 R12.1@2001.54,-631.54 ; L6.1@2089.04,-241.54 C91.2@2174.04,-241.54 ; C1.2@2461.54,83.46 2461.54,114.87 v1(2463.56,116.9) ; v1(3091.54,-68.48) R16.1@3091.54,-36.54 ; v1(3133.54,-650.48) 3136.54,-647.48 R63.1@3161.54,-647.48 ; v1(3141.54,-68.48) R15.1@3141.54,-36.54 ; C6.2@3231.54,28.46 v1(3231.54,57.52)
  Secondary Side w12: C91.2@2174.04,-241.54 2174.04,-201 2193.04,-182 2285,-182 2324,-221 2324,-270 2352,-298 2403,-298 R18.1@2405,-300
  Secondary Side w20: C71.2@1426.54,-169.04 1426.54,-153.87 1521.54,-153.87 L3.1@1521.54,-169.04
  other v1: 1492.96,120.16
VDD_MCU_1V2: C75.2 C84.2 C85.2 C86.2 C87.2 C88.2 C89.2 C90.2 L4.2 U1.E9 U1.E11 U1.F9 U1.F11 U1.G14 U1.G15 U1.J14 U1.J15 U1.K5 U1.K6 U1.P10 U1.P13 U1.R10 U1.R13 | length 953.4
  Primary Side w10: U1.G15@1757.48,-555.51 v1(1773.23,-539.76)
  Primary Side w12: v1(1426.77,-665.75) U1.K5@1442.52,-650 ; v1(1458.27,-665.75) U1.K6@1474.02,-650 ; v1(1552.75,-508.27) U1.F9@1568.5,-524.02 ; v1(1552.75,-476.77) U1.E9@1568.5,-492.52 ; U1.R10@1600,-807.48 v1(1615.75,-823.23) ; U1.P10@1600,-775.98 v1(1615.75,-791.73) ; U1.F11@1631.5,-524.02 v1(1647.25,-508.27) ; U1.E11@1631.5,-492.52 v1(1647.25,-476.77) ; U1.R13@1694.49,-807.48 v1(1710.24,-823.23) ; U1.P13@1694.49,-775.98 v1(1710.23,-791.72) ; U1.J14@1725.98,-618.5 v1(1741.79,-602.78) ; U1.G14@1725.98,-555.51 v1(1741.79,-539.78) ; U1.J15@1757.48,-618.5 v1(1773.23,-602.75) ; v1(2228,-399) v1@2229,-398.98
  Primary Side w20: L4.2@2181.54,-398.98 v1@2229,-398.98
  Secondary Side w5: C85.2@1757.51,-659.51 1757.51,-618.47 v1(1773.23,-602.75) ; v1(1773.23,-539.76) 1788.97,-524.02 1814.05,-524.02 C86.2@1831.54,-506.54
  Secondary Side w5.3: v1(1710.24,-823.23) 1725.95,-838.94 1725.95,-965.84 1717.95,-973.84 1717.95,-1013.89 C84.2@1734.53,-1030.47
  Secondary Side w12: C89.2@1401.54,-631.54 1426.68,-656.68 1426.68,-665.67 v1(1426.77,-665.75) ; v1(1552.75,-476.77) 1552.75,-475.32 C88.2@1586.54,-441.54 ; C90.2@1605.2,-757.48 1616.95,-769.94 1615.75,-771.13 v1(1615.75,-791.73) ; v1(1647.25,-476.77) 1647.91,-476.1 1651.97,-476.1 C87.2@1676.53,-447.52 ; C85.2@1757.51,-659.51 C85.2@1762.54,-664.54 ; C75.2@1976.54,-950.04 1976.54,-959.1 2017.18,-959.1 v1(2017.18,-960.1)
VDD_MCU_3V3: C49.1 C50.1 C51.1 C52.1 C53.1 C54.1 C55.1 C56.1 C57.1 C58.1 C59.1 C60.1 C61.1 C62.1 C63.1 C64.1 C72.2 C73.2 L3.2 R74.1 R75.1 U1.A9 U1.A18 U1.B1 U1.E7 U1.E10 U1.E13 U1.E16 U1.F7 U1.F10 U1.F13 U1.F16 U1.G5 U1.G6 U1.H5 U1.H6 U1.L14 U1.L15 U1.M1 U1.M5 U1.M6 U1.N14 U1.N15 U1.P9 U1.R9 U1.V19 U1.W8 | length 1864.2
  Primary Side w10: v1(1300.79,-728.74) U1.M1@1316.54,-712.99 ; v1(1300.79,-382.28) U1.B1@1316.54,-398.03 ; v1(1426.77,-728.74) U1.M5@1442.52,-712.99 ; v1(1426.77,-571.26) U1.H5@1442.52,-587.01 ; v1(1426.77,-539.76) U1.G5@1442.52,-555.51 ; v1(1458.27,-728.74) U1.M6@1474.02,-712.99 ; v1(1458.27,-571.26) U1.H6@1474.02,-587.01 ; v1(1458.27,-539.76) U1.G6@1474.02,-555.51 ; v1(1489.76,-508.27) U1.F7@1505.51,-524.02 ; v1(1489.76,-476.77) U1.E7@1505.51,-492.52 ; v1(1521.26,-949.21) U1.W8@1537.01,-933.46 ; R74.1@1522.04,-244.48 1597.68,-244.48 1607.18,-253.98 1607.18,-263.83 v1(1593.99,-277.02) ; v1(1552.75,-823.23) U1.R9@1568.5,-807.48 ; v1(1552.75,-791.73) U1.P9@1568.5,-775.98 ; v1(1552.75,-350.79) U1.A9@1568.5,-366.54 ; v1(1584.25,-508.27) U1.F10@1600,-524.02 ; v1(1584.25,-476.77) U1.E10@1600,-492.52 ; U1.F13@1694.49,-524.02 v1(1710.24,-508.27) ; U1.E13@1694.49,-492.52 v1(1710.24,-476.77) ; U1.N14@1725.98,-744.49 v1(1741.73,-760.24) ; U1.L14@1725.98,-681.5 v1(1741.73,-697.22) ; U1.N15@1757.48,-744.49 v1(1773.23,-760.24) ; U1.L15@1757.48,-681.5 v1(1773.23,-697.22) ; U1.F16@1788.98,-524.02 v1(1804.73,-508.27) ; U1.E16@1788.98,-492.52 v1(1804.73,-476.77) ; U1.A18@1851.97,-366.54 v1(1867.72,-350.79) ; U1.V19@1883.46,-901.97 v1(1899.21,-917.72)
  Secondary Side w5: 1505.51,-492.52 1531.6,-492.52 1537.01,-497.93 C62.1@1537.01,-536.54
  Secondary Side w5.3: v1(1426.77,-728.74) 1426.77,-727.02 1442.45,-711.34 1442.45,-686.34 1447.25,-681.54 1479.78,-681.54 1484.48,-676.84 C50.1@1484.48,-657 ; 1505.51,-492.52 1505.51,-516 1513.51,-524 1520,-524 1520,-525 C62.1@1531.54,-536.54 ; C73.2@1606.54,-240.04 1606.54,-277 1615.99,-277 v1(1615.99,-278.02) ; v1(1867.72,-350.79) C58.1@1870,-350
  Secondary Side w10: C72.2@1241.54,-720.04 1276.68,-720.04 1284.68,-728.04 1300.08,-728.04 v1(1300.79,-728.74) ; C53.1@1270,-385 1300.79,-385 v1(1300.79,-382.28) ; C64.1@1456.3,-616.98 1456.54,-572.99 v1(1458.27,-571.26) ; v1(1489.76,-508.27) 1489.54,-508.27 1489.54,-536.54 C63.1@1491.54,-536.54 ; v1(1489.76,-476.77) 1505.51,-492.52 ; C49.1@1515,-990 1515,-970 1520,-965 1520,-950.47 v1(1521.26,-949.21) ; C62.1@1531.54,-536.54 C62.1@1537.01,-536.54 ; v1(1552.75,-823.23) v1(1552.75,-791.73) 1552.75,-756.54 C52.1@1564.9,-757.48 ; C61.1@1571.54,-536.54 1584.25,-523.82 v1(1584.25,-508.27) ; v1(1584.25,-476.77) 1586.54,-477.48 1611.54,-502.48 C60.1@1611.54,-536.54 ; C73.2@1593.99,-244.04 C73.2@1606.54,-240.04 ; C54.1@1651.54,-756.54 C55.1@1696.54,-756.54 1696.54,-748.1 1729.6,-748.1 v1(1741.73,-760.24) v1(1773.23,-760.24) ; C56.1@1696.54,-671.54 1709.68,-684.68 1729.19,-684.68 v1(1741.73,-697.22) ; C59.1@1696.54,-536.54 1710.24,-522.83 v1(1710.24,-508.27) ; v1(1899.21,-917.72) 1922.28,-917.72 C57.1@1925,-915
  Secondary Side w12: v1(1458.27,-728.74) 1462.24,-728.74 C51.1@1484.48,-706.5
  Secondary Side w20: R75.1@1181.54,-458.04 1181.54,-421.64 v1(1182.66,-421.64) ; L3.2@1521.54,-244.04 1593.99,-244.04 v1(1593.99,-277.02)
VDDA_MCU_3V3: C9.2 C10.2 C11.2 C12.2 C13.2 C42.1 C43.1 C44.2 C83.2 L5.2 SW2.1 SW2.4 SW3.1 SW3.4 U1.P6 U1.R6 U6.5 U7.5 U8.5 U9.5 U10.5 U11.5 U12.2 U13.4 | length 1654.7
  Primary Side w5: v1(1458.27,-823.23) U1.R6@1474.02,-807.48 ; v1(1458.27,-791.73) U1.P6@1474.02,-775.98
  Primary Side w5.3: L5.2@1206.54,-734.04 1206.54,-773.98 v1(1269.49,-773.98) ; v1(1528.03,-1177.52) 1531.1,-1177.52 SW2.4@1531.1,-1127.17 ; SW2.1@1531.1,-1272.83 1531.1,-1219.45 v1(1533.03,-1217.52)
  Primary Side w10: U6.5@135,-1119 135,-1088.07 v1(136.54,-1086.54) ; U7.5@280,-1119 280,-1081.44 v1(280.18,-1081.27) ; v1(419.54,-1080.54) 420,-1081 U8.5@420,-1119 ; U9.5@560,-1119 560,-1084.02 v1(561.54,-1082.48) ; v1(699.54,-1082.54) 700,-1083 U10.5@700,-1119 ; U11.5@845,-1119 845,-1081 v1(846,-1080) ; v1(1256,-1200) 1256.1,-1200.1 SW3.1@1256.1,-1272.83 ; v1(1256,-1176) 1256.1,-1176 SW3.4@1256.1,-1127.17
  Primary Side w12: v1(918.95,-920.84) 933.95,-935.84 933.95,-937.5 U13.4@980,-937.5 ; U12.2@985,-1137.2 1032,-1137.2 1044,-1149.2 v1(1044,-1196)
  Secondary Side w10: v1(136.54,-1086.54) 161.54,-1061.54 C10.2@206.54,-1061.54 260.44,-1061.54 v1(280.18,-1081.27) ; v1(419.54,-1080.54) 419.54,-1059.48 426.54,-1052.48 551.54,-1052.48 ; C11.2@491.54,-1061.54 491.54,-1052.48 551.54,-1052.48 ; v1(561.54,-1082.48) 561.54,-1062.48 551.54,-1052.48 ; v1(699.54,-1082.54) 699.54,-1064.48 706.54,-1057.48 771.54,-1057.48 C12.2@771.54,-1066.54 780.59,-1057.48 836.54,-1057.48 846,-1065.48 v1(846,-1080) ; C43.1@954,-1180.5 954,-1177 C42.1@1013,-1177 ; C83.2@1227,-786.5 1227,-777.1 1266.36,-777.1 v1(1269.49,-773.98) ; v1(1458.27,-823.23) 1458.5,-823 C44.2@1485,-823 ; v1(1458.27,-791.73) 1469.27,-791.73 C13.2@1485,-776
  Secondary Side w12: v1(918.95,-920.84) C9.2@918.95,-889.84 ; C42.1@1013,-1177 1040,-1177 1044,-1181 v1(1044,-1196)
VDDOSC_MCU_3V3: C76.2 C77.2 C92.2 L6.2 U1.H16 U1.H17 | length 312.2
  Primary Side w10: U1.H16@1788.98,-587.01 v1(1804.73,-571.26) ; U1.H17@1820.47,-587.01 v1(1836.22,-571.26)
  Secondary Side w10: v1(1940.51,-387.52) 2001.54,-387.52 C77.2@2001.54,-386.54 ; C76.2@2001.54,-431.54 C77.2@2001.54,-386.54 ; L6.2@2014.04,-241.54 2008.04,-247.54 C92.2@2008.04,-331.54 2001.54,-331.54 C77.2@2001.54,-386.54 ; C77.2@2001.54,-386.54 2001.54,-388.48 1999.59,-386.54 C77.2@2001.54,-386.54
pads on no net: A:J1.10 A:J1.11 A:U2.2 A:U4.22 A:U4.23 A:U4.26 A:U4.27 A:U4.29 A:U4.30 A:U4.33 A:U4.34 A:U4.43 A:U4.44 A:U4.45 A:U4.46 A:U4.48 A:U4.52 A:U4.53 A:U4.57 A:U4.58 A:U4.59 A:U9.3 A:U9.5 A:U9.7 A:U10.6 D4.5 J1.13 J1.16 J1.29 J1.32 J1.41 J1.43 J1.44 J1.66 J1.113 J1.114 J1.115 J1.116 J1.117 J1.118 J1.119 J1.136 J1.171 J1.172 J1.173 J1.174 J1.175 J1.176 J1.177 J1.178 J9.61 J9.62 J9.63 U1.A12 U1.A13 U1.B3 U1.B9 U1.B10 U1.B12 U1.B13 U1.C4 U1.C5 U1.C10 U1.C12 U1.C13 U1.D5 U1.D10 U1.D12 U1.D13 U1.D14 U1.D17 U1.D18 U1.E17 U1.F17 U1.F18 U1.H4 U1.L19 U1.M18 U1.M19 U1.N19 U1.T10 U1.T19 U1.U9 U1.U10 U1.U18 U1.V9 U1.V10 U1.V13 U1.V18 U1.W9 U1.W12 U1.W18 U12.1 U12.3 U12.7 U12.8 U13.8 U13.9 U14.11 U14.12 U14.13 U14.14
copper on no net: | length 292.9
  Secondary Side w6: 3790,-1315 3840,-1365 ; 3850.36,-1340 ccw(c3815,-1340) 3850.36,-1340

## Polygon pours and split planes (outlines as drawn)
$$$25123 on Primary Side (solid, remove dead copper, pour order 0): 150,275 -235,275 -235,-165 150,-165
GND on Inner Layer 2 (split plane): 700,280.11 700,-675 675,-700 -238.86,-700 -238.86,280.12
GND on Inner Layer 2 (split plane): 222 vertices, not listed, extent -238.86,-1681.03 3877.48,280.11
VDD_1V2 on Inner Layer 5 (split plane): 3474.9,-1344.9 3260.1,-1344.9 3260.1,-555 3259.71,-553.05 3258.6,-551.4 3256.95,-550.29 3255,-549.9 2314.04,-549.9 2314.04,-356.84 2313.66,-354.89 2312.55,-353.24 2310.9,-352.13 2308.95,-351.74 2160.1,-351.74 2160.1,-305.1 3474.9,-305.1
VDD_MCU_1V2 on Inner Layer 5 (split plane): 2291.85,-545.74 2145,-545.74 2143.05,-546.13 2141.4,-547.24 2140.29,-548.89 2139.9,-550.84 2139.9,-1034.9 1565.1,-1034.9 1565.1,-690 1564.71,-688.05 1563.6,-686.4 1561.95,-685.29 1560,-684.9 1410.1,-684.9 1410.1,-460.1 2020,-460.1 2021.95,-459.71 2023.6,-458.6 2024.71,-456.95 2025.1,-455 2025.1,-375.1 2291.85,-375.1
no net on Inner Layer 5 (split plane): 2191.56,-1360.1 2192.06,-1360.1 2192.06,-1360.11 2192.45,-1365.49 2191.56,-1360.1 2191.56,-1262.51
EMU_1V8 on Inner Layer 5 (split plane): 693.9,-677.89 676.89,-694.9 -232.9,-694.9 -232.9,274.42 693.9,274.42
GND on Inner Layer 5 (split plane): 186 vertices, not listed, extent -233.9,-1624.9 3870.9,274.42
VDD_3V3 on Inner Layer 6 (split plane): 2000.41,-646.9 1926,-646.9 1924.05,-647.29 1922.4,-648.4 1922.16,-648.74 1921.91,-648.91 1920.8,-650.57 1920.41,-652.52 1920.41,-661.42 1660.61,-661.42 1660.61,-542.62 1895.51,-542.62 1897.46,-542.23 1899.12,-541.12 1900.22,-539.47 1900.61,-537.52 1900.61,-257.62 2000.41,-257.62
VDD_3V3 on Inner Layer 6 (split plane): 1890.41,-532.42 1655.51,-532.42 1653.56,-532.81 1651.91,-533.91 1650.8,-535.57 1650.41,-537.52 1650.41,-666.52 1650.41,-667.52 1650.8,-669.47 1651.91,-671.12 1653.56,-672.23 1655.51,-672.62 1920.41,-672.62 1920.41,-943.42 1714.61,-943.42 1714.61,-762.52 1714.22,-760.57 1713.12,-758.91 1711.46,-757.81 1709.51,-757.42 1589.51,-757.42 1587.56,-757.81 1585.91,-758.91 1584.8,-760.57 1584.41,-762.52 1584.41,-994.9 1480.1,-994.9 1480.1,-941.38 1505.8,-941.38 1507.75,-940.99 1509.4,-939.89 1510.51,-938.23 1510.9,-936.28 1510.9,-899.28 1510.51,-897.33 1509.4,-895.68 1507.75,-894.57 1505.8,-894.18 1480.8,-894.18 1480.8,-774.18 1480.41,-772.23 1479.3,-770.58 1477.65,-769.47 1475.7,-769.08 1295.1,-769.08 1295.1,-754 1294.71,-752.05 1293.6,-750.4 1291.95,-749.29 1290,-748.9 1202.1,-748.9 1202.1,-460 1201.71,-458.05 1200.6,-456.4 1198.95,-455.29 1197,-454.9 1159.1,-454.9 1159.1,-257.62 1890.41,-257.62
VDD_3V3 on Inner Layer 6 (split plane): 178 vertices, not listed, extent -123.36,-1681.03 3877.48,-710.1
VDD_3V3 on Inner Layer 6 (split plane): 3877.48,280.11 3877.48,-909.9 2917.1,-909.9 2917.1,-705 2916.71,-703.05 2915.6,-701.4 2913.95,-700.29 2912,-699.9 2137,-699.9 2135.05,-700.29 2133.4,-701.4 2132.29,-703.05 2131.9,-705 2131.9,-1085.9 1650.1,-1085.9 1650.1,-1000 1649.71,-998.05 1648.6,-996.4 1646.95,-995.29 1645,-994.9 1596.1,-994.9 1596.1,-768.1 1703.9,-768.1 1703.9,-949 1704.29,-950.95 1705.4,-952.6 1707.05,-953.71 1709,-954.1 1926,-954.1 1927.95,-953.71 1929.6,-952.6 1930.71,-950.95 1931.1,-949 1931.1,-657.62 2005.51,-657.62 2007.46,-657.23 2009.12,-656.12 2009.35,-655.77 2009.6,-655.6 2010.71,-653.95 2011.1,-652 2011.1,-252 2010.71,-250.05 2009.6,-248.4 2007.95,-247.29 2006,-246.9 1154,-246.9 1152.05,-247.29 1150.4,-248.4 1149.29,-250.05 1148.9,-252 1148.9,-252.52 1148.9,-460 1149.29,-461.95 1150.4,-463.6 1152.05,-464.71 1154,-465.1 1190.9,-465.1 1190.9,-748.9 1133,-748.9 1131.05,-749.29 1129.4,-750.4 1128.29,-752.05 1127.9,-754 1127.9,-755 1127.9,-769.9 890,-769.9 888.05,-770.29 886.4,-771.4 885.29,-773.05 884.9,-775 884.9,-861.9 89,-861.9 87.05,-862.29 85.4,-863.4 84.29,-865.05 83.9,-867 83.9,-885.9 -238.86,-885.9 -238.86,-800 779.48,-800 800,-779.48 800,280.11
VDD_3V3 on Inner Layer 6 (split plane): 700,280.11 700,-675 675,-700 -238.86,-700 -238.86,280.12
VDD_3V3 on Inner Layer 6 (split plane): 1284.9,-774.18 1284.9,-774.68 1285.29,-776.63 1286.4,-778.29 1288.05,-779.39 1290,-779.78 1470.1,-779.78 1470.1,-899.78 1470.49,-901.73 1471.6,-903.39 1473.25,-904.49 1475.2,-904.88 1500.6,-904.88 1500.6,-930.48 1474.8,-930.48 1472.85,-930.87 1471.2,-931.98 1470.09,-933.63 1469.7,-935.58 1469.7,-1000 1470.09,-1001.95 1471.2,-1003.6 1472.85,-1004.71 1474.8,-1005.1 1587.06,-1005.1 1587.4,-1005.6 1589.05,-1006.71 1591,-1007.1 1639.9,-1007.1 1639.9,-1091 1639.9,-1327.42 -45.36,-1327.42 -45.36,-1226.1 -45.67,-1222.18 -46.59,-1218.35 -48.09,-1214.72 -50.15,-1211.36 -52.7,-1208.37 -55.7,-1205.81 -59.05,-1203.76 -62.69,-1202.25 -66.51,-1201.33 -70.44,-1201.03 -238.86,-1201.03 -238.86,-896.1 90,-896.1 91.95,-895.71 93.6,-894.6 94.71,-892.95 95.1,-891 95.1,-872.1 890,-872.1 891.95,-871.71 893.6,-870.6 894.71,-868.95 895.1,-867 895.1,-780.1 1133,-780.1 1134.95,-779.71 1136.6,-778.6 1137.71,-776.95 1138.1,-775 1138.1,-760.1 1197,-760.1 1198.95,-759.71 1199.87,-759.1 1284.9,-759.1
EMU_5V0 on Inner Layer 9 (split plane): 700,280.11 700,-675 675,-700 -238.86,-700 -238.86,280.12
EMU_5V0 on Inner Layer 9 (split plane): 3877.48,280.11 3877.48,-832.42 3545.61,-832.42 3545.61,-42.52 3545.22,-40.57 3544.12,-38.91 3542.46,-37.81 3540.51,-37.42 2451.95,-37.42 2449.99,-37.81 2448.34,-38.91 2447.24,-40.57 2446.85,-42.52 2446.85,-115.74 2050.61,-115.74 2050.61,-27.52 2050.22,-25.57 2049.12,-23.91 2047.46,-22.81 2045.51,-22.42 1550.61,-22.42 1550.61,280.11
EMU_5V0 on Inner Layer 9 (split plane): 199 vertices, not listed, extent -238.86,-1681.03 3877.48,280.11